# Altium PCB middlePCB_rev3.PcbDoc
Units mm, origin at the board's own origin, x right, y up, seen from the top; angles counter-clockwise.
Board outline 100.07 x 100 mm, 2 copper layers (Top Layer, Bottom Layer); 63 components, 65 nets, 272 pads, 238 vias.
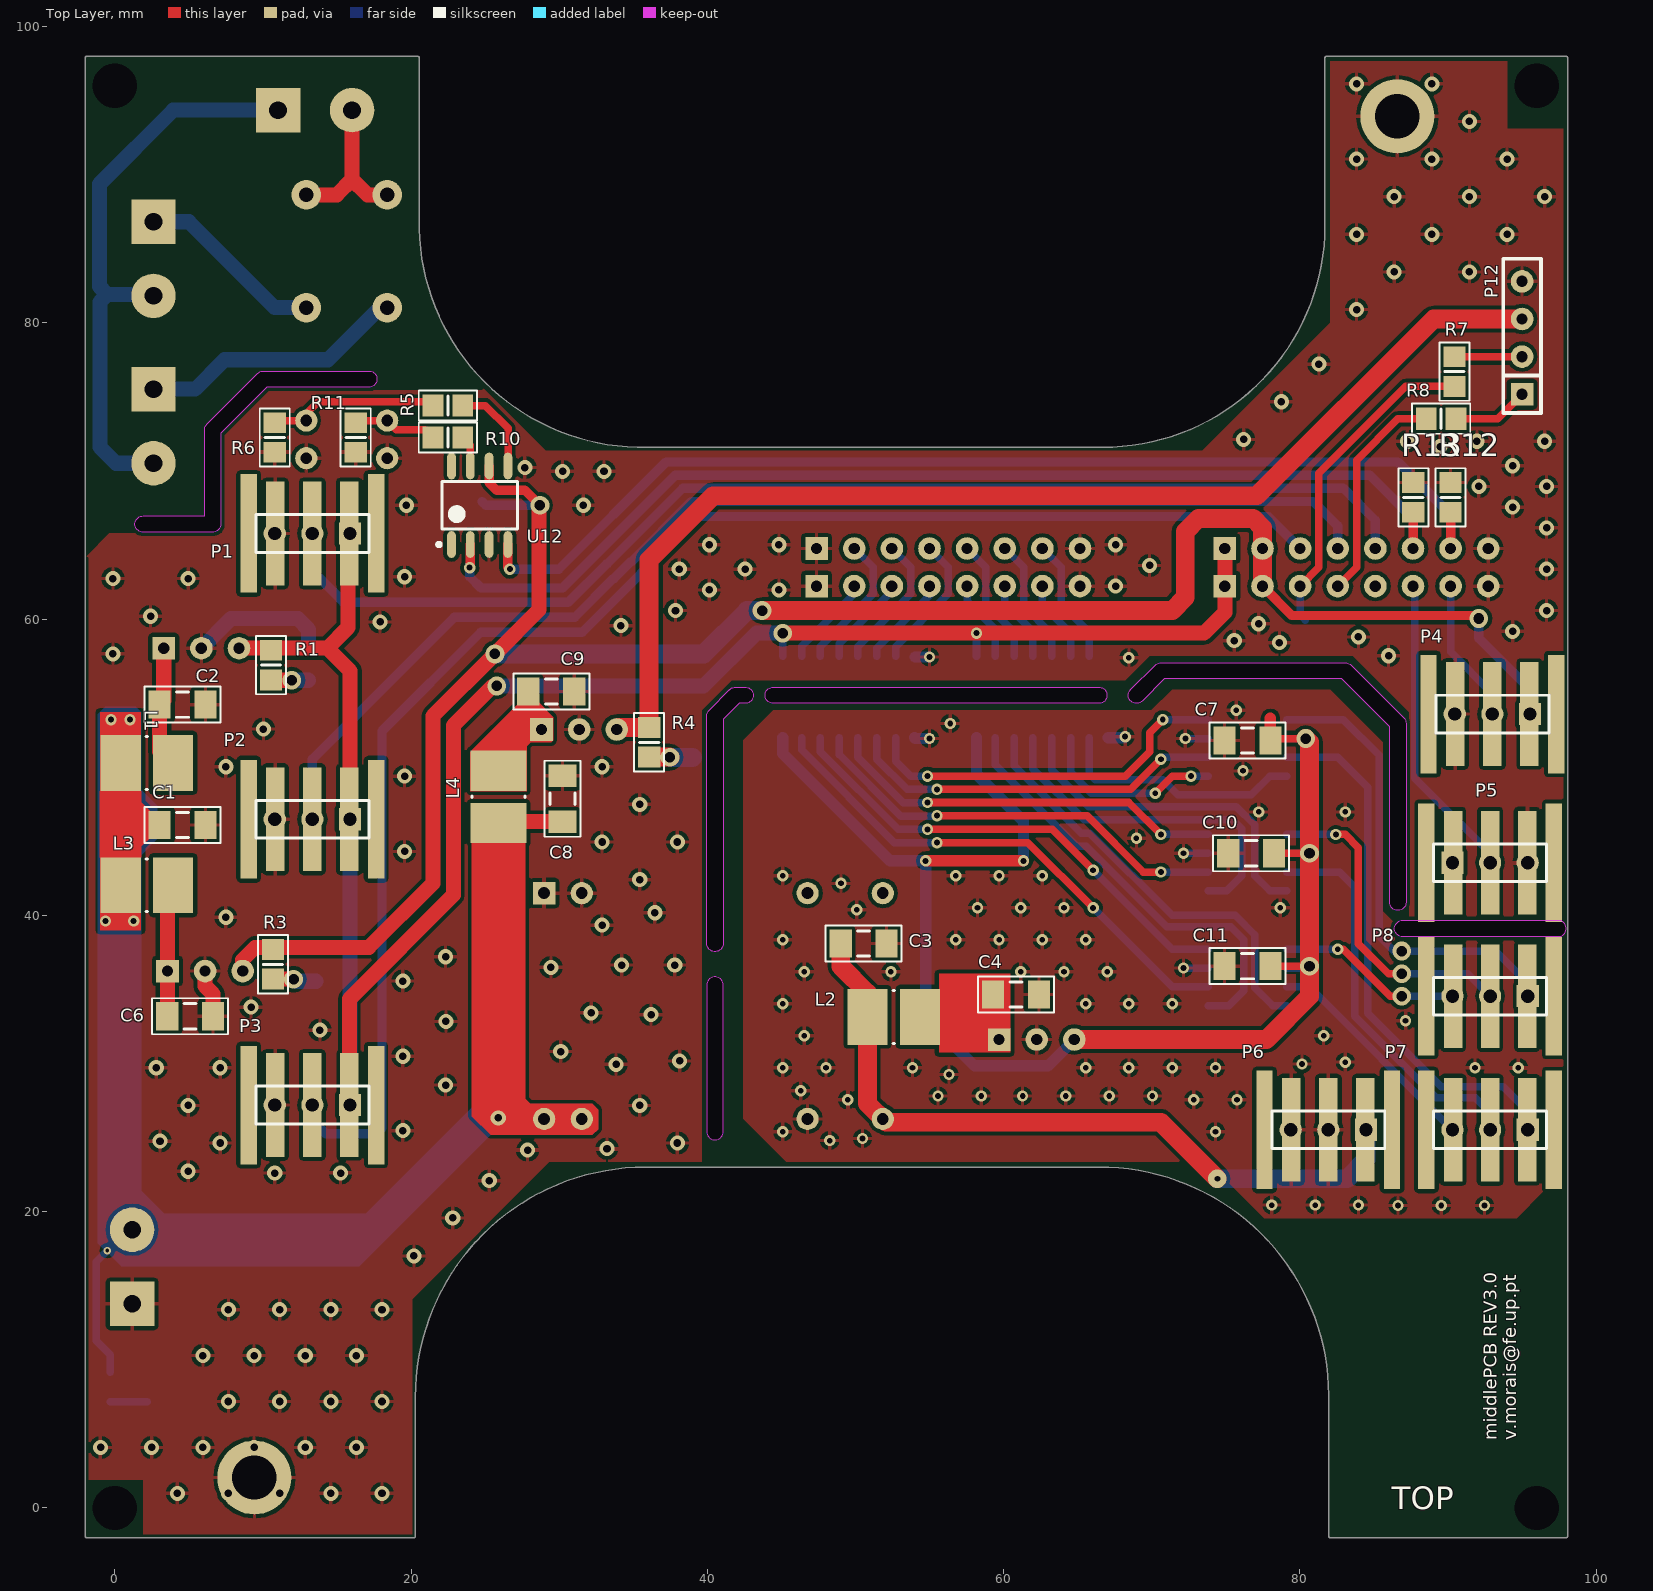
[diagram p0: Top Layer view]
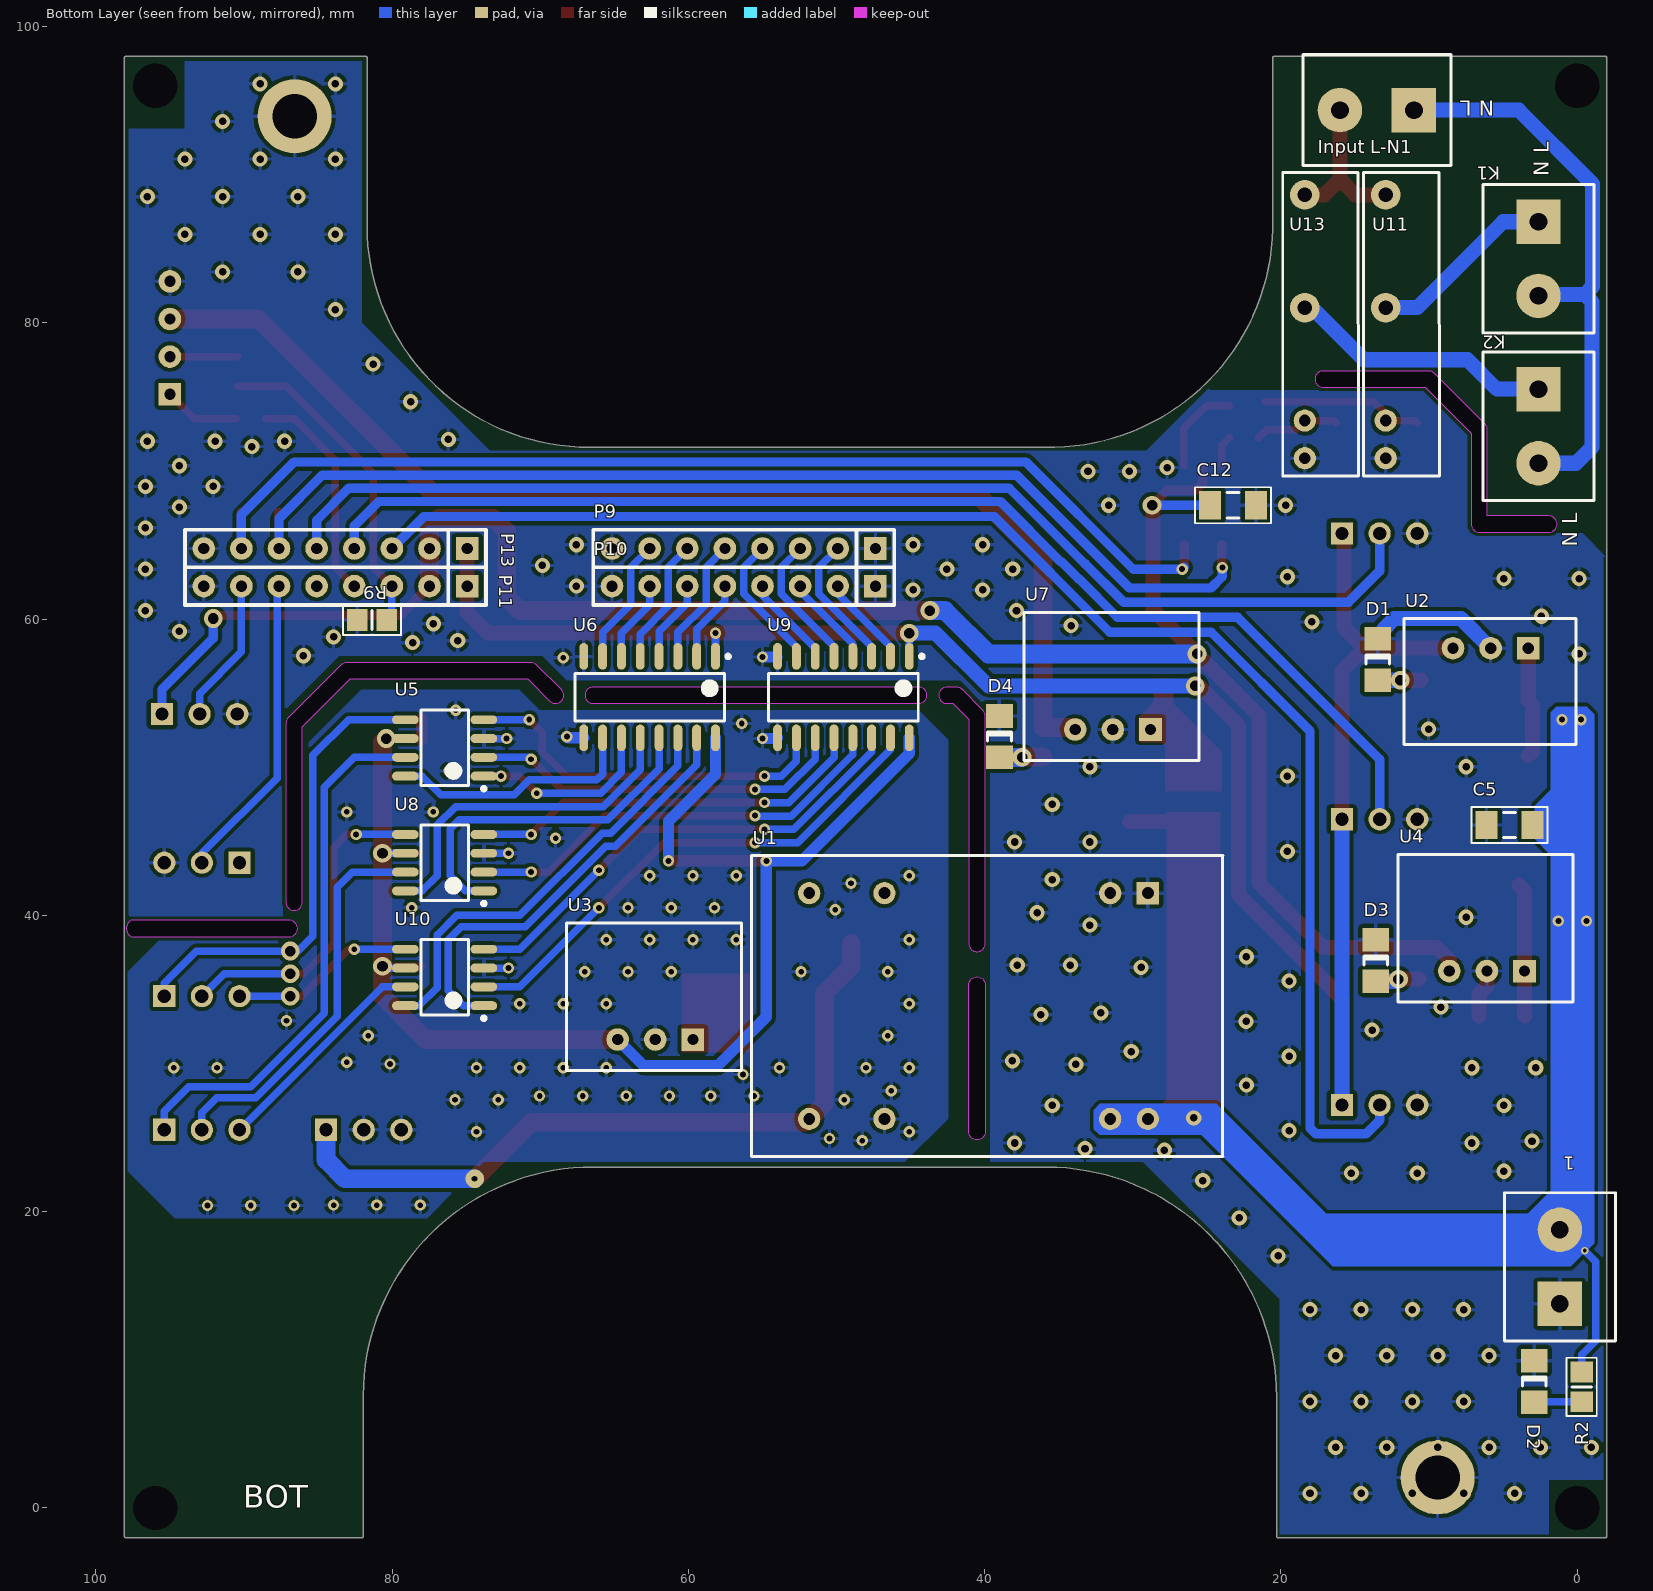
[diagram p1: Bottom Layer view, seen from below]

## Layer stack, top to bottom
Top Solder: solder mask 0.0102, Solder Resist, Dk 3.5
Top Layer: signal copper 0.0356
Dielectric 1: dielectric 0.32, FR-4, Dk 4.8
Bottom Layer: signal copper 0.0356
Bottom Solder: solder mask 0.0102, Solder Resist, Dk 3.5

## Board outline
-1.905,-2.005 20.193,-2.005 ccw(c20.193,-1.905) 20.293,-1.905 20.293,7.493 cw(c35.814,7.493) 35.814,23.014 66.421,23.014 ccw(c66.421,23.114) 66.421,23.014 cw(c66.484,7.557) 81.942,7.62 81.942,-1.905 ccw(c82.042,-1.905) 82.042,-2.005 97.968,-2.005 ccw(c97.968,-1.905) 98.068,-1.905 98.068,97.892 ccw(c97.968,97.892) 97.968,97.992 81.788,97.992 ccw(c81.788,97.892) 81.688,97.892 81.688,86.551 cw(c66.707,86.582) 66.675,71.601 ccw(c66.675,71.501) 66.675,71.601 35.941,71.601 ccw(c35.941,71.501) 35.939,71.601 cw(c35.623,86.678) 20.547,86.361 cw(c35.623,86.678) 20.547,86.362 20.547,86.36 20.547,97.892 ccw(c20.447,97.892) 20.447,97.992 -1.905,97.992 ccw(c-1.905,97.892) -2.005,97.879 ccw(c-1.905,97.866) -2.005,97.866 -2.005,-1.905 ccw(c-1.905,-1.905)
cut-out: 69.35,54.475 cw(c68.961,54.864) 68.572,55.253 70.223,56.904 cw(c70.611,56.517) 70.612,57.065 83.058,57.065 cw(c83.058,56.515) 83.448,56.903 87.003,53.348 cw(c86.616,52.96) 87.164,52.959 87.164,40.894 cw(c86.614,40.894) 86.064,40.894 86.064,52.731 82.83,55.965 70.84,55.965
cut-out: 44.45,54.314 cw(c44.45,54.864) 44.45,55.414 66.421,55.414 cw(c66.421,54.864) 66.971,54.864 cw(c66.421,54.864) 66.421,54.314
cut-out: 39.963,25.4 ccw(c40.513,25.4) 41.063,25.4 41.063,35.306 ccw(c40.513,35.306) 39.963,35.306
cut-out: 86.926,38.566 cw(c86.926,39.116) 86.926,39.666 97.612,39.666 cw(c97.318,39.116) 97.612,38.566
cut-out: 1.905,65.871 cw(c1.905,66.421) 1.905,66.971 6.054,66.971 6.054,72.771 cw(c6.604,72.771) 6.216,73.161 6.215,73.16 9.644,76.589 9.643,76.588 cw(c10.033,76.2) 10.033,76.75 17.145,76.75 cw(c17.145,76.2) 17.695,76.2 cw(c17.145,76.2) 17.145,75.65 10.261,75.65 7.154,72.543 7.154,66.421 cw(c6.604,66.421) 6.604,65.871
cut-out: 39.963,38.1 39.963,53.467 cw(c40.513,53.467) 40.125,53.857 40.124,53.856 41.521,55.253 41.52,55.252 cw(c41.91,54.864) 41.91,55.414 42.545,55.414 cw(c42.545,54.864) 43.095,54.864 cw(c42.545,54.864) 42.545,54.314 42.138,54.314 41.063,53.239 41.063,38.1 cw(c40.513,38.1)

## Design rules (kind name [scope] priority, off if disabled: settings)
Clearance [All] p1: gap=0.254 ignorepadtopadclearanceinfootprint=FALSE
Height [All] p1: minheight=0 maxheight=254 prefheight=12.7
HoleSize [All] p1: absolutevalues=TRUE maxlimit=25.4 minlimit=0.2 maxpercent=80.000 minpercent=20.000
PlaneClearance [All] p1: clearance=2.54
PolygonConnect [All] p1: connectstyle=Relief reliefconductorwidth=0.254 reliefentries=4 polygonreliefangle="90 Angle" airgapwidth=0.254
RoomDefinition middlePCB_rev3 [InComponentClass('middlePCB_rev3')] p1: confinementstyle=ConfineIn formatcopy=TRUE lockcomponents=FALSE outline -43.613,-86.525 7.187,-86.525 7.187,-61.125 -43.613,-61.125
RoutingVias [All] p1: holewidth=0.711 width=1.27 viastyle="Through Hole" minholewidth=0.711 minwidth=1.27 maxholewidth=0.711 maxwidth=1.27
SilkToSilkClearance [All] p1: silktosilkclearance=0.025
SilkToSolderMaskClearance [IsPad] p1: minsilkscreentomaskgap=0.025 clearancetoexposedcopper=TRUE
SolderMaskExpansion [All] p1: expansion=0.102
Width [All] p1: maxlimit=3.81 minlimit=0.127 preferedwidth=0.508
25 further rules are at their usual default settings.

## Components (designator, comment, footprint, x,y, rotation, side; value= is the part's Value field where it differs from the comment)
1 "P 2p 5mm" connector1x2_parafuso 1.168,16.281 r90 bottom
C1 "C 10uF 1206 MLCC 50V X5R" CAPC_1206 4.572,46.101 r180 top
C2 "C 10uF 1206 MLCC 50V X5R" CAPC_1206 4.572,54.229 r180 top
C3 "C 10uF 1206 MLCC 50V X5R" CAPC_1206 50.546,38.1 r180 top
C4 "C 10uF 1206 MLCC 50V X5R" CAPC_1206 60.833,34.671 r180 top
C5 "C 10uF 1206 MLCC 50V X5R" CAPC_1206 4.572,46.101 r180 bottom
C6 "C 10uF 1206 MLCC 50V X5R" CAPC_1206 5.08,33.198 r180 top
C7 "C 10uF 1206 MLCC 50V X5R" CAPC_1206 76.454,51.808 r0 top
C8 "C 10uF 1206 MLCC 50V X5R" CAPC_1206 30.226,47.879 r270 top
C9 "C 10uF 1206 MLCC 50V X5R" CAPC_1206 29.464,55.118 r180 top
C10 "C 10uF 1206 MLCC 50V X5R" CAPC_1206 76.708,44.196 r0 top
C11 "C 10uF 1206 MLCC 50V X5R" CAPC_1206 76.454,36.576 r0 top
C12 "C 10uF 1206 MLCC 50V X5R" CAPC_1206 23.233,67.691 r0 bottom
D1 "IC LED 1206" DIODE_1206 13.462,57.277 r90 bottom
D2 "IC LED 1206" DIODE_1206 2.896,8.534 r90 bottom
D3 "IC LED 1206" DIODE_1206 13.589,36.957 r90 bottom
D4 "IC LED 1206" DIODE_1206 38.989,52.07 r90 bottom
"Input L-N1" "P 2p 5mm" connector1x2_parafuso 13.516,94.361 r0 bottom
K1 "P 2p 5mm" connector1x2_parafuso 2.608,84.328 r270 bottom
K2 "P 2p 5mm" connector1x2_parafuso 2.608,73.025 r270 bottom
L1 "IND RLS-126" "Inductor - RLS-126" 2.159,50.292 r0 top
L2 "IND RLS-126" "Inductor - RLS-126" 52.578,33.147 r0 top
L3 "IND RLS-126" "Inductor - RLS-126" 2.159,42.037 r0 top
L4 "IND RLS-126" "Inductor - RLS-126" 25.908,48.006 r90 top
P1 "P 8p 2.54 SR DW 3P" MOLEX_3p_105431_1103 13.335,65.786 r180 top locked
P2 "P 8p 2.54 SR DW 3P" MOLEX_3p_105431_1103 13.335,46.495 r180 top locked
P3 "P 8p 2.54 SR DW 3P" MOLEX_3p_105431_1103 13.335,27.203 r180 top locked
P4 "P 8p 2.54 SR DW 3P" MOLEX_3p_105431_1103 92.989,53.594 r180 top locked
P5 "P 8p 2.54 SR DW 3P" MOLEX_3p_105431_1103 92.837,43.561 r0 top locked
P6 "P 8p 2.54 SR DW 3P" MOLEX_3p_105431_1103 81.915,25.527 r180 top locked
P7 "P 8p 2.54 SR DW 3P" MOLEX_3p_105431_1103 92.837,25.527 r180 top locked
P8 "P 8p 2.54 SR DW 3P" MOLEX_3p_105431_1103 92.837,34.554 r180 top locked
P9 "P 8p 2.54 SR DW 8P" "Header 8x1 8.5mm" 47.371,64.77 r0 bottom
P10 "P 8p 2.54 SR DW 8P" "Header 8x1 8.5mm" 47.371,62.23 r0 bottom
P11 "P 8p 2.54 SR DW 8P" "Header 8x1 8.5mm" 74.93,62.23 r0 bottom
P12 "P 4p 2.54 MOL FAN" "HEADER 4p molex" 94.996,75.184 r90 top
P13 "P 8p 2.54 SR DW 8P" "Header 8x1 8.5mm" 74.93,64.77 r0 bottom
R1 "R 150 1/8W 0805 1%" RESC_0805 10.541,56.896 r90 top
R2 "R 2k7 1/8 0805 1%" RESC_0805 -0.305,8.179 r90 bottom
R3 "R 330 1/8 0805 1%" RESC_0805 10.668,36.703 r90 top
R4 "R 1k2 1/8 0805 1%" RESC_0805 36.068,51.689 r90 top
R5 "R 10 1/8W 0805 1%" RESC_0805 22.479,74.422 r180 top
R6 "R 0 1/8W 0805" RESC_0805 10.795,72.263 r270 top
R7 "R 0 1/8W 0805" RESC_0805 90.424,76.708 r270 top
R8 "R 0 1/8W 0805" RESC_0805 89.535,73.533 r180 top
R9 "R 0 1/8W 0805" RESC_0805 81.356,59.944 r180 bottom
R10 "R 10 1/8W 0805 1%" RESC_0805 22.479,72.263 r180 top
R11 "R 0 1/8W 0805" RESC_0805 16.256,72.263 r270 top
R12 "R 0 1/8W 0805" RESC_0805 90.17,68.224 r270 top
R13 "R 0 1/8W 0805" RESC_0805 87.655,68.224 r270 top
U1 "IC DC/DC 15V ISO" "MeanWell SCWNo6" 28.981,26.264 r270 bottom
U2 "IC DC/DC 3V3" "DC/DC - R-78E3.3" 0.092,60.039 r0 bottom
U3 "IC DC/DC 5V" "DC/DC - OKI-78SR-E" 68.23,29.523 r180 bottom
U4 "IC DC/DC 5V" "DC/DC - OKI-78SR-E" 12.092,34.146 r180 bottom
U5 "IC Driver 5A Dual ENA IX4340" SOIC-MIC4126 76.454,51.308 r0 bottom
U6 "IC ISO SI8660" SOIC127P610X155-16N 62.611,54.737 r270 bottom
U7 "IC DC/DC 12V" "DC/DC - OKI-78SR-E" 37.344,50.453 r180 bottom
U8 "IC Driver 5A Dual ENA IX4340" SOIC-MIC4126 76.454,43.561 r0 bottom
U9 "IC ISO SI8660" SOIC127P610X155-16N 49.53,54.737 r270 bottom
U10 "IC Driver 5A Dual ENA IX4340" SOIC-MIC4126 76.454,35.814 r0 bottom
U11 "IC Relay 5A 5V 5x20mm" "Relay - G6DN" 12.923,73.406 r90 bottom
U12 "IC DUAL MOS DRIVER MIC4126" SOIC-MIC4126 24.63,67.691 r90 top
U13 "IC Relay 5A 5V 5x20mm" "Relay - G6DN" 18.384,73.406 r90 bottom

## Footprints (in the part's own frame and the unit in brackets; to place one, negate y for a bottom-side part, rotate by r counter-clockwise, add the part's x,y. Pads: shape width x height; smd on the part's side, far side on the other; paste and mask are expansions set on the pad)
CAPC_1206 [mm] "Chip Capacitor, Body 3.2x1.6mm, IPC Low Density"
  rect 1.5x1.9 smd: 1(-1.55,0) 2(1.55,0)
  silkscreen extent -2.57,-1.21 2.57,1.21, body extent -1.7,-0.9 1.7,0.9, height 1.35
connector1x2_parafuso [mm] "Connector; Header; 2 Position"
  rect 3x3 hole 1.2: 1(-2.5,0)
  round 3 hole 1.2: 2(2.5,0)
  silkscreen extent -5,-3.75 5,3.75, body extent -4.92,-4.53 5.68,4.47, height 14.6
"DC/DC - OKI-78SR-E" [mil]
  rect 60x60 hole 30: 1(336.22,82.68)
  round 60 hole 30: 2(236.22,82.68) 3(136.22,82.68)
  silkscreen extent 0,0 465,393, body extent 8,8 456,385, height 693
"DC/DC - R-78E3.3" [mil]
  rect 60x60 hole 30: 1(126.38,78.74)
  round 60 hole 30: 2(226.38,78.74) 3(326.38,78.74)
  silkscreen extent 0,0 457,335, body extent 8,8 447,325, height 402
DIODE_1206 [mm] "Chip Diode; Body 3.2 x 1.6 mm (LxW typ)"
  rect 1.6x1.8 smd: 1(-1.4,0) 2(1.4,0)
  silkscreen extent -0.3,-0.8 0.3,0.8
"HEADER 4p molex" [mil] "header 4p"
  rect 60x60 hole 30: 1(0,0)
  round 60 hole 30: 2(100,0) 3(200,0) 4(300,0)
  silkscreen extent -50,-50 360,50, body extent -50,-102 352,128, height 407
"Header 8x1 8.5mm" [mil] "Stackable 8 pin header"
  rect 60x60 hole 30: 1(0,0)
  round 60 hole 30: 2(100,0) 3(200,0) 4(300,0) 5(400,0) 6(500,0) 7(600,0) 8(700,0)
  silkscreen extent -50,-50 750,50, body extent -50,-50 750,50, height 335
"Inductor - RLS-126" [mm]
  rect 2.72x3.77 smd: 1(-1.77,0) 2(1.77,0)
  silkscreen extent -0.05,-1.79 0.05,1.79, body extent -2.55,-1.8 2.55,1.8, height 2.6
"MeanWell SCWNo6" [mm]
  rect 1.5x1.5 hole 0.8: 2(-15.24,0)
  round 1.5 hole 0.8: 3(-15.24,-2.54) 9(-15.24,-17.78) 11(-15.24,-22.86) 14(0,-22.86) 16(0,-17.78) 22(0,-2.54) 23(0,0)
  silkscreen extent -17.78,-26.75 2.54,5.08, body extent -17.65,-26.64 2.44,4.95, height 10.2
MOLEX_3p_105431_1103 [mm] "conector 3p 2.5mm"
  rect 1.1x8 smd: 0(-4.305,0) 0(4.305,0)
  rect 1.5x1.5 hole 0.9: 1(-2.54,0)
  rect 1.24x7 smd: 1(-2.5,0) 2(0,0) 3(2.5,0)
  round 1.5 hole 0.9: 2(0,0) 3(2.54,0)
  silkscreen extent -3.81,-1.27 3.81,1.27, body extent -5.36,-4.14 5.36,4.11, height 11.3
"Relay - G6DN" [mm]
  round 1.5 hole 0.8: 1(-2.54,0)
  round 1.5 hole 0.8 paste+0: 2(0,0)
  round 2 hole 1: 3(7.62,0) 4(15.24,0)
  silkscreen extent -3.73,-3.62 16.74,1.49, body extent -3.33,-3.53 16.51,1.42, height 13
RESC_0805 [mm] "Chip Resistor, Body 2.0x1.3mm, IPC Low Density"
  rect 1.4x1.5 smd: 1(-1,0) 2(1,0)
  silkscreen extent -1.96,-1.01 1.96,1.01, body extent -1.07,-0.7 1.08,0.7, height 0.65
SOIC127P610X155-16N [mm] "SOIC, 16-Leads, Body 10,05x3,95mm, Pitch 1,27mm, IPC Medium Density"
  oval 1.8x0.6 smd: 1(-2.75,4.445) 2(-2.75,3.175) 3(-2.75,1.905) 4(-2.75,0.635) 5(-2.75,-0.635) 6(-2.75,-1.905) 7(-2.75,-3.175) 8(-2.75,-4.445) 9(2.75,-4.445) 10(2.75,-3.175) 11(2.75,-1.905) 12(2.75,-0.635) 13(2.75,0.635) 14(2.75,1.905) 15(2.75,3.175) 16(2.75,4.445)
  silkscreen extent -2.87,-5.05 1.6,5.42, body extent -3.08,-5.05 3.08,5.05, height 1.55
SOIC-MIC4126 [mm] "SOIC, 8-Leads, Body 5,08x3,95mm, Pitch 1,27mm, IPC Medium Density"
  oval 1.8x0.6 smd: 1(-2.65,1.905) 2(-2.65,0.635) 3(-2.65,-0.635) 4(-2.65,-1.905) 5(2.65,-1.905) 6(2.65,-0.635) 7(2.65,0.635) 8(2.65,1.905)
  silkscreen extent -2.77,-2.55 1.6,2.88, body extent -2.83,-2.55 2.83,2.55, height 1.55

## Part data
1 "Input L-N1" K1 K2: library part gen_purpose_conn_1x2, "Bloques de terminales de PCB de perfil estándar RS de 5,0 mm", Price=0,24, RS VPN=896-6696
C1 C2 C3 C4 C5 C6 C7 C8 C9 C10 C11 C12: library part "Capacitor SMD", "Capacitores de cerâmica multicamada MLCC - SMD/SMT 1206 50V 10uF 20% X5R", Mouser VPN=963-UMK316BBJ106ML-T, Price=0,31
D1 D2 D3 D4: library part LED, "LEDs padrão - SMD GREEN WATER CLEAR", Mouser VPN=604-APT3216SGC, Price=0,387
L1 L2 L3 L4: library part Inductor, "Indutores fixos Line Inductors for RECOM Power Supply", Mouser VPN=919-RLS-126, Price=0,549
P1 P2 P3 P4 P5 P6 P7 P8: library part "Header 3", "Distribuidores e Alojamento de Fios CGrid Hrd SRDW THo le 8ckt", Mouser VPN=538-87937-0800, Price=0,621
P9 P10 P11 P13: library part jumper_8p, "Distribuidores e Alojamento de Fios CGrid Hrd SRDW THo le 8ckt", Mouser VPN=538-87937-0800, Price=0,621
P12: library part "Header 4p molex", "Distribuidores e Alojamento de Fios 4 PIN HEADER WITH FR R WITH FRICTION LOCK", Mouser VPN=538-47053-3000, Price=0,405
R1: library part Resistor, "Resistores de Filme Espesso - SMD 1/8watt 150ohms 1% 100ppm", Mouser VPN=71-CRCW0805-150-E3, Price=0,09
R2: library part Resistor, "Resistores de Filme Espesso - SMD 1/8watt 2.7Kohms 1% 100ppm", Mouser VPN=71-CRCW0805-2.7K-E3, Price=0,09
R3: library part Resistor, "Resistores de Filme Espesso - SMD 1/8Watt 330ohms 1% Commercial Use", Mouser VPN=71-CRCW0805330RFKEAC, Price=0,09
R4: library part Resistor, "Resistores de Filme Espesso - SMD 1/8watt 1.2Kohms 1%", Mouser VPN=71-CRCW08051K20FKEA, Price=0,09
R5 R10: library part Resistor, "Resistores de Filme Espesso - SMD 1/8Watt 10ohms 1% Commercial Use", Mouser VPN=71-CRCW080510R0FKEAC, Price=0,09
R6 R7 R8 R9 R11 R12 R13: library part Resistor, "Resistores de Filme Espesso - SMD 1/8Watt 0ohms Commercial Use", Mouser VPN=71-CRCW08050000Z0EAC, Price=0,09
U1: library part "MEANWELL - SCWN06", "Conversores CC/CC com isolação 6W 18-36Vin 15Vout 400mA DIP24 Iso", Mouser VPN=709-SCWN06B-15, Price=8,26
U2: library part "DC/DC - R-78E3.3", "Conversores CC/CC sem isolação 3.3V 500MA OUT THRU", Mouser VPN=919-R-78E3.3-0.5, Price=2,43
U3 U4: library part "DC/DC - R-78E3.3", "Conversores CC/CC sem isolação 7-36Vin 5Vout 1.5A VSIP Encapsulated", Mouser VPN=580-OK78SR5/1.5W36EC, Price=5,31
U5 U8 U10: library part "Driver - IX4340", "Drivers de portas Dual 5A Gate Driver IC", Mouser VPN=747-IX4340NETR, Price=0,891
U6 U9: library part "ISO SI8660", "Isoladores digitais 1 kV 6-channel digital isolator", Mouser VPN=634-SI8660BA-B-IS1, Price=1,82
U7: library part "DC/DC - R-78E3.3", "Conversores CC/CC sem isolação 15-36Vin 12Vout 1.0A VSIP Encapsulated", Mouser VPN=580-OKI78SR12/1W36EC, Price=5,31
U11 U13: library part "Relay - G6DN", "Relés para uso geral 1 form A w/ 5VDC Coil-standard type", Mouser VPN=653-G6DN-1A-LDC5, Price=1,59
U12: library part MOS_DRIVER-MIC4126, "Drivers de portas 1.5A Dual High Speed MOSFET Driver with Low Thermal Impedance", Mouser VPN=998-MIC4126YME, Price=0,756

## Free pads (board coordinates)
  round 1.524 hole 3 unplated: 4(0,0) 4(0,96) 4(96,0) 4(96,96)
  round 5 hole 3: 5(9.423,2.057) 5(86.577,93.943)

## Via types
v1: diameter 1.016, hole 0.508, Top Layer to Bottom Layer, 124 vias
v2: diameter 0.762, hole 0.381, Top Layer to Bottom Layer, 66 vias
v3: diameter 0.762, hole 0.4, Top Layer to Bottom Layer, 31 vias
v4: diameter 1.27, hole 0.711, Top Layer to Bottom Layer, 15 vias
v5: diameter 1.27, hole 0.4, Top Layer to Bottom Layer, 1 vias
v6: diameter 0.508, hole 0.254, Top Layer to Bottom Layer, 1 vias

## Nets (pads, with @x,y where several pads share a name; then routed paths per layer and width w, separated by ;. In a path a pad name is that pad's centre, name@x,y a point inside that pad or via, vN(x,y) a via of type N, cw(c..) or ccw(c..) an arc to the next point about the centre after c; other vN are vias at no path point)
3V3: P1.1 P2.1 P3.1 P11.1 P13.1 R1.2 U2.3 U6.1 U9.1 | length 137.3
  Top Layer w1.016: U2.3 14.351,58.039 ; P3.1@15.835,27.203 15.835,34.367 22.86,41.392 22.86,52.832 25.527,55.499 v4(25.781,55.499) ; P2.1@15.875,46.495 15.875,56.515 14.351,58.039 ; P1.1@15.875,65.786 15.748,65.659 15.748,59.436 14.351,58.039 ; v4(45.085,59.055) v3(58.166,59.055) 73.533,59.055 74.93,60.452 P11.1 P13.1
  Bottom Layer w0.508: U9.1 v4(45.085,59.055) v4@45.085,59.182 ; U6.1 v3(58.166,59.055) v3@58.166,59.182
  Bottom Layer w1.016: P3.1@15.875,27.203 P2.1@15.875,46.495 ; v4(25.781,55.499) 39.751,55.499 43.307,59.055 v4(45.085,59.055)
3V3GND: 1.1 C1.1 C2.1 C5.1 C6.1 C8.1 C9.1 C12.1 D1.2 D2.2 D3.2 D4.2 P1.3 P2.3 P3.3 P4.3 P5.3 P9.1 P9.8 P10.1 P10.8 P11.8 P12.4 P13.8 pad.5 R6.2 R9.1 R11.2 R12.1 R13.1 U1.2 U1.3 U2.2 U4.2 U6.8 U7.2 U9.8 U11.1 U12.3 U13.1 | length 13.2
  Top Layer w1.016: U4.2 6.092,35.234 6.63,34.696 C6.1
  Bottom Layer w0.762: U9.8@54.019,57.443 v3(54.991,57.443)
  Bottom Layer w1.016: U2.2 7.842,60.039 12.351,60.039 13.081,59.309 D1.2@13.081,58.677
  other v1: 4.216,0.991 7.671,0.991 11.125,0.991 14.58,0.991 18.034,0.991 -0.965,4.089 2.489,4.089 5.944,4.089 9.398,4.089 12.852,4.089 16.307,4.089 7.671,7.188 11.125,7.188 14.58,7.188 18.034,7.188 5.944,10.287 9.398,10.287 12.852,10.287 16.307,10.287 7.671,13.386 11.125,13.386 14.58,13.386 18.034,13.386 20.193,17.018 22.809,19.583 25.273,22.098 10.795,22.606 15.24,22.606 4.953,22.733 27.864,24.155 33.223,24.257 7.112,24.638 37.973,24.638 3.048,24.765 19.44,25.468 4.953,27.178 35.433,27.178 22.327,28.55 2.794,29.718 7.112,29.718 33.833,29.947 38.125,30.175 19.44,30.493 30.099,30.81 13.843,32.258 22.352,32.842 36.195,33.299 32.156,33.426 9.195,33.807 19.44,35.573 29.439,36.5 34.214,36.652 37.795,36.652 22.327,37.211 32.893,39.345 7.493,39.878 36.449,40.183 35.433,42.418 19.558,44.323 32.893,44.958 37.973,44.958 35.433,47.498 19.558,49.403 7.493,50.038 32.893,50.038 10.033,52.578 85.979,57.531 -0.127,57.658 78.613,58.42 75.565,58.547 83.947,58.801 94.361,59.182 34.163,59.563 77.216,59.69 17.907,59.817 2.413,60.198 37.846,60.579 96.647,60.579 40.132,61.976 44.831,61.976 67.564,62.23 -0.127,62.738 4.953,62.738 19.558,62.865 38.1,63.373 42.545,63.373 96.647,63.373 69.85,63.627 40.132,65.024 44.831,65.024 67.564,65.024 96.647,66.167 94.361,67.564 19.685,67.691 31.623,67.691 92.075,68.961 96.647,68.961 30.226,69.977 33.02,69.977 27.686,70.231 94.361,70.358 89.459,71.653 87.249,72.009 91.948,72.009 96.52,72.009 76.2,72.136 78.74,74.676 81.28,77.216 83.82,80.899 86.36,83.439 91.44,83.439 83.82,85.979 88.9,85.979 93.98,85.979 86.36,88.519 91.44,88.519 96.52,88.519 83.82,91.059 88.9,91.059 93.98,91.059 91.44,93.599 83.82,96.139 88.9,96.139
  other v2: 68.453,57.404
5V: C12.2 P4.1 P11.2 P13.2 R3.2 U4.3 U12.6 | length 139.3
  Top Layer w0.635: U12.6 25.265,69.215 25.773,68.707 27.678,68.707 v4(28.694,67.691) v4@28.63,67.627 ; P11.2 79.451,60.249 91.872,60.249 v4(92.075,60.046)
  Top Layer w1.016: U4.3 8.632,37.004 9.474,37.846 17.145,37.846 21.463,42.164 21.463,53.467 v4(25.654,57.658) 28.63,60.634 v4@28.63,67.627
  Top Layer w1.27: v4(43.688,60.579) 71.374,60.579 72.263,61.468 72.263,65.913 73.152,66.802 76.835,66.802 77.47,66.167 P13.2 P11.2
  Bottom Layer w0.635: C12.2@24.783,67.945 25.037,67.691 v4(28.694,67.691) ; v4(92.075,60.046) 92.075,58.725 95.529,55.27 P4.1@95.529,53.594
  Bottom Layer w1.27: v4(25.654,57.658) 39.751,57.658 42.672,60.579 v4(43.688,60.579)
12V: P12.3 R4.2 U7.3 | length 79.2
  Top Layer w1.27: U7.3@33.909,52.578 34.02,52.689 R4.2 36.068,64.008 40.386,68.326 77.089,68.326 89.027,80.264 P12.3
24VDC: 1.2 C1.2 C5.2 C8.2 L1.1 L3.1 L4.1 R2.2 U1.22 U1.23 | length 13.2
  Top Layer w1.016: L4.1 26.001,46.329 C8.2
  Bottom Layer w0.508: v6(-0.508,17.374) -1.245,16.637 -1.245,11.278 -0.305,10.338 R2.2
  other v1: 25.883,26.34
  other v3: -0.635,39.624 1.27,39.624 -0.254,53.213 1.016,53.213
ena_uh: U5.8 U6.10 | length 16.9
  Bottom Layer w0.508: U6.10 65.786,49.53 66.167,49.149 70.739,49.149 71.755,48.133 76.708,48.133 77.978,49.403 U5.8
ena_ul: U5.1 U6.11 | length 12.8
  Top Layer w0.508: v3(70.231,48.251) 71.383,49.403 v3(72.644,49.403)
  Bottom Layer w0.508: U6.11 64.516,49.657 65.922,48.251 v3(70.231,48.251) ; v3@72.517,49.403 v3(72.644,49.403) U5.1
ena_vh: U6.12 U8.8 | length 23.4
  Bottom Layer w0.508: U6.12 63.246,49.849 65.742,47.353 75.716,47.353 76.962,46.107 76.962,42.672 77.978,41.656 U8.8
ena_vl: U6.13 U8.1 | length 23.7
  Bottom Layer w0.508: U6.13 61.976,49.911 65.432,46.455 75.465,46.455 76.073,45.847 76.073,42.672 75.057,41.656 U8.1
ena_wh: U6.14 U10.8 | length 29.1
  Bottom Layer w0.508: U6.14 60.706,50.103 65.252,45.557 65.822,45.557 71.374,40.005 75.637,40.005 76.962,38.68 76.962,35.128 78.181,33.909 U10.8
ena_wl: U6.15 U10.1 | length 29.7
  Bottom Layer w0.508: U6.15 59.436,50.165 64.942,44.659 65.577,44.659 70.993,39.243 75.321,39.243 76.2,38.364 76.2,34.925 75.184,33.909 U10.1
I_U: P1.2 P13.5 | length 81.1
  Bottom Layer w0.635: P1.2@13.335,65.786 13.335,63.246 15.43,61.151 30.621,61.151 33.213,63.743 33.245,63.743 38.336,68.834 82.931,68.834 85.09,66.675 P13.5
I_V: P2.2 P13.4 | length 82.7
  Bottom Layer w0.635: P2.2@13.335,46.495 13.335,50.546 22.923,60.134 31.041,60.134 33.634,62.727 33.666,62.727 34.819,63.88 34.87,63.88 38.935,67.945 80.899,67.945 82.55,66.294 P13.4
I_W: P3.2 P13.3 | length 101.9
  Bottom Layer w0.635: P3.2@13.335,27.203 13.335,26.162 14.224,25.273 17.653,25.273 18.034,25.654 18.034,52.451 24.701,59.118 31.545,59.118 39.356,66.929 77.851,66.929 P13.3
IN_UH: P8.1 U5.5 | length 31.7
  Bottom Layer w0.508: U5.5 82.931,53.213 85.344,50.8 85.344,38.608 86.36,37.592 v4(86.868,37.592) 93.218,37.592 95.377,35.433 P8.1@95.377,34.554
IN_UL: P7.1 U5.7 | length 36.4
  Bottom Layer w0.508: U5.7 82.55,50.673 84.582,48.641 84.582,33.397 89.531,28.448 93.726,28.448 95.377,26.797 P7.1@95.377,25.527
IN_VH: P8.2 U8.5 | length 22
  Top Layer w0.508: v3(82.423,45.466) 83.058,45.466 83.947,44.577 83.947,38.1 85.979,36.068 v4(86.868,36.068)
  Bottom Layer w0.508: U8.5 v3(82.423,45.466) ; v4(86.868,36.068) 91.323,36.068 P8.2@92.837,34.554
IN_VL: P7.2 U8.7 | length 26.7
  Bottom Layer w0.508: U8.7 82.677,42.926 83.693,41.91 83.693,33.209 89.216,27.686 91.821,27.686 92.837,26.67 P7.2@92.837,25.527
IN_WH: P8.3 U10.5 | length 12.7
  Top Layer w0.508: v3(82.55,37.719) 82.931,37.719 86.106,34.544 v4(86.868,34.544)
  Bottom Layer w0.508: U10.5 v3(82.55,37.719) ; v4(86.868,34.544) 86.762,34.544 86.751,34.554 P8.3@90.297,34.554
IN_WL: P7.3 U10.7 | length 15.2
  Bottom Layer w0.508: U10.7 80.645,35.179 P7.3@90.297,25.527
ISO_5gnd: C3.1 C4.1 C7.1 C10.1 C11.1 P6.2 P6.3 U1.16 U3.2 U5.3 U6.9 U8.3 U9.9 U10.3 | length 7.2
  Bottom Layer w0.508: v3@72.009,36.449 U10.3 ; v3(72.136,44.196) U8.3 ; v3(72.263,51.943) U5.3
  Bottom Layer w0.762: U9.9 54.019,51.943 v3(54.991,51.943) ; U6.9 68.116,51.987 v3(68.199,52.07)
  other v2: 78.105,20.447 81.026,20.447 83.947,20.447 86.62,20.423 89.541,20.423 92.462,20.423 48.254,24.802 50.469,24.942 45.085,25.4 74.295,25.4 49.466,27.559 72.834,27.559 75.755,27.559 55.562,27.813 58.483,27.813 61.277,27.813 64.198,27.813 67.12,27.813 70.04,27.813 46.298,28.157 56.311,29.26 45.085,29.718 48.006,29.718 53.848,29.718 65.532,29.718 68.453,29.718 71.374,29.718 74.295,29.718 91.821,29.718 94.742,29.718 80.137,29.972 83.058,30.099 46.545,31.877 81.597,31.877 87.122,32.893 45.085,34.036 65.532,34.036 68.453,34.036 71.374,34.036 46.545,36.195 52.387,36.195 61.151,36.195 64.072,36.195 66.992,36.195 45.085,38.354 56.769,38.354 59.69,38.354 62.611,38.354 65.532,38.354 50.089,40.386 58.229,40.513 61.151,40.513 64.072,40.513 78.676,40.513 49.022,42.164 45.085,42.672 56.769,42.672 59.69,42.672 62.611,42.672 68.961,45.212 77.216,46.99 83.058,46.99 76.154,49.758 56.388,52.959 75.692,53.858
  other v3: 72.136,36.449
ISO_5V: C7.2 C10.2 C11.2 U3.3 U5.6 U6.16 U8.6 U9.16 U10.6 | length 100.7
  Top Layer w0.508: C11.2 78.131,36.449 78.258,36.576 v4(80.645,36.576) ; C7.2 78.139,51.943 v4(80.391,51.943) ; C10.2 v4(80.645,44.196)
  Top Layer w0.762: v3(54.737,43.688) v3(61.341,43.688) ; C7.2 78.004,53.314
  Top Layer w1.27: U3.3 77.724,31.623 80.645,34.544 v4(80.645,36.576) v4(80.645,44.196) 80.645,51.689 v4(80.391,51.943)
  Bottom Layer w0.508: U10.6 80.518,36.449 v4(80.645,36.576) ; U8.6 v4(80.645,44.196) ; U5.6 v4(80.391,51.943)
  Bottom Layer w0.762: U9.16 45.085,50.927 52.324,43.688 v3(54.737,43.688) 54.737,33.147 58.039,29.845 62.992,29.845 U3.3 ; U6.16 58.166,49.53 61.341,46.355 v3(61.341,43.688)
ISO_15V: C3.2 L2.1 P6.1 U1.14 | length 49.9
  Top Layer w1.27: C3.2 48.996,36.577 50.808,34.765 L2.1 50.808,27.297 52.07,26.035 70.612,26.035 v5(74.422,22.225)
  Bottom Layer w1.27: v5(74.422,22.225) 83.185,22.225 84.455,23.495 P6.1@84.455,25.527
iso_ENA_UH: P9.7 U6.7 | length 8.6
  Bottom Layer w0.508: P9.7 63.881,63.5 63.881,61.022 65.786,59.117 U6.7
iso_ENA_UL: P10.7 U6.6 | length 5.5
  Bottom Layer w0.508: P10.7 62.611,60.96 64.516,59.055 U6.6
iso_ENA_VH: P9.6 U6.5 | length 8.5
  Bottom Layer w0.508: P9.6 61.341,63.5 61.341,61.022 ; 61.341,60.891 63.246,58.986 U6.5
iso_ENA_VL: P10.6 U6.4 | length 5.5
  Bottom Layer w0.508: P10.6 60.071,61.083 61.976,59.178 U6.4
iso_ENA_WH: P9.5 U6.3 | length 8.6
  Bottom Layer w0.508: P9.5 58.801,63.5 58.801,61.022 60.706,59.117 U6.3
iso_ENA_WL: P10.5 U6.2 | length 5.5
  Bottom Layer w0.508: P10.5 57.531,61.214 59.436,59.309 U6.2
iso_PWM_UH: P9.4 U9.7 | length 9.3
  Bottom Layer w0.508: U9.7 52.705,58.148 56.261,61.704 56.261,63.5 P9.4
iso_PWM_UL: P10.4 U9.6 | length 6.2
  Bottom Layer w0.508: U9.6 51.435,58.039 54.991,61.595 P10.4
iso_PWM_VH: P9.3 U9.5 | length 9.3
  Bottom Layer w0.508: U9.5 50.165,58.148 53.721,61.704 53.721,63.5 P9.3
iso_PWM_VL: P10.3 U9.4 | length 6.2
  Bottom Layer w0.508: U9.4 48.895,58.34 52.451,61.896 P10.3
iso_PWM_WH: P9.2 U9.3 | length 9.3
  Bottom Layer w0.508: U9.3 47.625,58.148 51.181,61.704 51.181,63.5 P9.2
iso_PWM_WL: P10.2 U9.2 | length 6.2
  Bottom Layer w0.508: U9.2 46.355,58.166 49.911,61.722 P10.2
NetC2_2: C2.2 L1.2 U2.1 | length 7.5
  Top Layer w1.016: L1.2@3.302,50.792 3.022,51.072 C2.2 3.302,54.509 U2.1
NetC4_2: C4.2 L2.2 U3.1
NetC6_2: C6.2 L3.2 U4.1 | length 9
  Top Layer w1.016: C6.2 3.552,33.22 U4.1 3.552,41.66 L3.2
NetC9_2: C9.2 L4.2 U7.1
NetD1_1: D1.1 R1.1 | length 2.5
  Top Layer w1.016: R1.1 10.56,55.877 v4(11.938,55.877)
  Bottom Layer w1.016: v4(11.938,55.877) D1.1@13.081,55.877
NetD2_1: D2.1 R2.1 | length 2.5
  Bottom Layer w0.508: R2.1 2.178,7.179 D2.1@2.184,7.185
NetD3_1: D3.1 R3.1 | length 3
  Top Layer w1.016: R3.1 12.049,35.703 v4(12.065,35.687)
  Bottom Layer w1.016: v4(12.065,35.687) 12.195,35.557 D3.1
NetD4_1: D4.1 R4.1 | length 2.9
  Top Layer w1.27: R4.1 37.449,50.689 v4(37.465,50.673)
  Bottom Layer w1.27: v4(37.465,50.673) 37.468,50.67 D4.1
"NetInput L-N1_1": "Input L-N1.1" K1.2 K2.2 | length 39.7
  Bottom Layer w1.016: K1.2@2.58,81.915 K1.2@2.667,81.828 ; K2.2 0.087,70.525 -1.016,71.628 -1.016,81.407 -0.508,81.915 ; K1.2 2.521,81.915 -0.508,81.915 ; 11.016,94.361 3.937,94.361 -1.043,89.381 -1.043,82.45 -0.508,81.915
"NetInput L-N1_2": "Input L-N1.2" U11.4 U13.4 | length 11
  Top Layer w1.016: U11.4 14.986,88.646 16.016,89.676 ; 16.016,94.361 16.016,89.676 ; U13.4 17.046,88.646 16.016,89.676
NetK1_1: K1.1 U11.3 | length 12.7
  Bottom Layer w1.016: K1.1@2.667,86.828 4.993,86.828 10.795,81.026 U11.3
NetK2_1: K2.1 U13.3 | length 18
  Bottom Layer w1.016: K2.1@2.667,75.525 5.421,75.525 7.408,77.512 14.393,77.512 17.907,81.026 U13.3
NetP11_3: P11.3 R7.2 R9.2 | length 22.1
  Top Layer w0.508: P11.3 81.28,63.5 81.28,69.85 87.138,75.708 R7.2
  Bottom Layer w0.508: P11.3 80.01,60.29 R9.2
NetP11_4: P11.4 R8.2 | length 14.9
  Top Layer w0.508: P11.4 83.82,63.5 83.82,70.739 86.614,73.533 R8.2
NetR5_1: R5.1 U12.5 | length 6.3
  Top Layer w0.508: R5.1 25.019,74.422 26.543,72.898 26.543,70.349 U12.5
NetR5_2: R5.2 R6.1 U11.2 | length 11.1
  Top Layer w0.508: R6.1 10.938,73.406 U11.2 12.923,73.883 13.716,74.676 R5.2@21.054,74.676
NetR10_1: R10.1 U12.7 | length 2.1
  Top Layer w0.508: R10.1 23.995,71.747 U12.7 U12.7@24.003,70.349
NetR10_2: R10.2 R11.1 U13.2 | length 5.8
  Top Layer w0.508: R11.1 16.399,73.406 U13.2 18.989,72.801 20.941,72.801 R10.2
PWM_FAN: P12.1 R8.1 | length 5.1
  Top Layer w0.508: R8.1 93.345,73.533 P12.1
pwm_uh: U5.4 U9.10 | length 25.4
  Top Layer w0.508: v3(54.864,49.403) 68.199,49.403 69.85,51.054 69.85,52.324 v3(70.739,53.213)
  Bottom Layer w0.508: U9.10 52.705,50.419 53.721,49.403 v3(54.864,49.403) ; v3(70.739,53.213) U5.4
pwm_ul: U5.2 U9.11 | length 25.6
  Top Layer w0.508: v3(55.499,48.514) 68.58,48.514 v3(70.612,50.546)
  Bottom Layer w0.508: U9.11 51.435,50.546 53.476,48.505 54.487,48.505 54.496,48.514 55.232,48.514 55.241,48.505 v3@55.499,48.505 ; v3(70.612,50.546) 70.739,50.673 U5.2
pwm_vh: U8.4 U9.12 | length 27.1
  Top Layer w0.508: v3(54.864,47.625) 68.453,47.625 v3(70.612,45.466)
  Bottom Layer w0.508: U9.12 50.165,50.673 53.231,47.607 v3@54.864,47.607 ; v3(70.612,45.466) U8.4
pwm_vl: U8.2 U9.13 | length 29.3
  Top Layer w0.508: v3(55.499,46.736) 65.629,46.736 69.439,42.926 v3(70.612,42.926)
  Bottom Layer w0.508: U9.13 48.895,50.865 53.051,46.709 v3@55.499,46.709 ; v3(70.612,42.926) U8.2
pwm_wh: U9.14 U10.4 | length 32.6
  Top Layer w0.508: v3(54.864,45.811) 63.282,45.811 v3(66.04,43.053)
  Bottom Layer w0.508: U9.14 47.625,51.058 52.872,45.811 v3(54.864,45.811) ; v3(66.04,43.053) 71.374,37.719 U10.4
pwm_wl: U9.15 U10.2 | length 34.9
  Top Layer w0.508: v3(55.499,44.913) 61.64,44.913 v3(66.04,40.513)
  Bottom Layer w0.508: U9.15 46.355,51.181 52.623,44.913 v3(55.499,44.913) ; v3(66.04,40.513) 71.374,35.179 U10.2
Relay_1: P13.7 R12.2 U12.4 | length 74.4
  Top Layer w0.635: v3@26.535,63.5 U12.4 ; P13.7 R12.2
  Bottom Layer w0.635: v3@26.535,63.5 v3(26.662,63.373) 29.972,63.373 37.211,70.612 86.614,70.612 90.17,67.056 P13.7
Relay_2: P13.6 R13.2 U12.2 | length 75.1
  Top Layer w0.635: v3(23.952,63.475) 23.995,63.517 U12.2 ; P13.6 87.655,64.795 R13.2
  Bottom Layer w0.635: v3(23.952,63.475) 23.952,62.865 24.714,62.103 30.226,62.103 37.846,69.723 84.709,69.723 87.63,66.802 P13.6
TACH_FAN: P12.2 R7.1 | length 4.6
  Top Layer w0.508: R7.1 94.98,77.708 P12.2
temp: P5.2 P11.6 | length 20.9
  Bottom Layer w0.508: P11.6@87.249,62.103 87.757,61.595 87.757,49.276 92.837,44.196 P5.2@92.837,43.561
V_DC: P4.2 P11.7 | length 10
  Bottom Layer w0.508: P11.7@89.662,62.23 90.17,61.722 90.17,57.785 92.989,54.966 P4.2@92.989,53.594
pads on no net: P1.0 P2.0 P3.0 P4.0 P5.0 P5.1 P6.0 P7.0 P8.0 P11.5 U1.9 U1.11 U12.1 U12.8

## Polygon pours and split planes (outlines as drawn)
ISO_5gnd on Top Layer "Top Layer-No Net" (solid, remove dead copper, pour order 12): 82.042,55.245 71.374,55.245 69.977,53.848 44.45,53.848 42.418,51.816 42.418,26.289 45.339,23.368 73.787,23.368 77.597,19.558 94.623,19.558 97.79,22.725 97.79,36.195 95.419,38.566 87.321,38.566 85.598,40.289 85.598,51.689
3V3GND on Top Layer "Top Layer-No Net" (solid, remove dead copper, pour order 22): 87.376,39.624 97.79,39.624 97.79,93.091 93.98,93.091 93.98,97.663 82.042,97.663 82.042,80.01 73.406,71.374 29.083,71.374 24.892,75.565 24.765,75.438 10.049,75.438 7.154,72.543 7.239,72.458 7.239,65.786 -0.381,65.786 -1.905,64.262 -1.778,64.135 -1.778,1.905 1.905,1.905 1.905,-1.778 20.066,-1.778 20.066,14.097 29.337,23.368 39.624,23.368 39.624,53.848 41.656,55.88 68.199,55.88 69.85,57.531 83.566,57.531 87.376,53.721
ISO_5gnd on Bottom Layer "Top Layer-No Net" (solid, remove dead copper, pour order 20): 82.082,55.245 71.414,55.245 70.017,53.848 44.45,53.848 42.458,51.856 42.458,26.289 45.379,23.368 73.827,23.368 77.637,19.558 94.663,19.558 97.83,22.725 97.83,36.195 95.459,38.566 87.361,38.566 85.638,40.289 85.638,51.689
3V3GND on Bottom Layer "Top Layer-No Net" (solid, remove dead copper, pour order 14): 87.376,39.624 97.79,39.624 97.79,93.091 93.98,93.091 93.98,97.663 82.042,97.663 82.042,80.01 73.406,71.374 29.083,71.374 24.892,75.565 24.765,75.438 10.049,75.438 7.154,72.543 7.239,72.458 7.239,65.786 -0.381,65.786 -1.905,64.262 -1.778,64.135 -1.778,1.905 1.905,1.905 1.905,-1.778 20.066,-1.778 20.066,14.097 29.337,23.368 39.624,23.368 39.624,53.848 41.656,55.88 68.199,55.88 69.85,57.531 83.566,57.531 87.376,53.721

## Other copper
Top Layer:
  rectangle net NetC4_2: 55.626,30.734 60.452,36.068
  rectangle net 24VDC: -1.016,38.989 1.778,43.942
  rectangle net 24VDC: -1.016,48.387 1.778,53.721
  region net NetC9_2: 27.813,48.387 27.813,51.435 28.067,51.689 29.464,51.689 29.591,51.816 29.591,53.395 28.575,54.411 28.575,55.968 27.266,55.968 27.266,54.317 24.003,51.054 24.003,48.387
  region net 24VDC: -1.016,48.387 -1.016,43.942 1.778,43.942 1.778,44.657 2.413,45.292 2.413,46.99 1.778,47.625 1.778,48.387
  region net 24VDC: 24.105,44.806 24.105,26.446 25.363,25.187 32.233,25.187 32.624,25.578 32.624,26.889 32.233,27.28 28.043,27.28 27.711,27.611 27.711,46.965 24.105,46.965
Bottom Layer:
  region net 24VDC: 0.432,16.307 -1.143,17.882 -1.143,29.964 1.778,29.964 1.778,21.412 3.327,19.863 16.942,19.863 20.547,23.468 24.359,27.28 32.233,27.28 32.624,26.848 32.624,25.578 32.233,25.187 25.363,25.187 16.483,16.307
  region net 24VDC: -1.143,53.594 -1.143,40.005 -1.143,23.114 1.778,23.114 1.778,44.069 2.872,45.163 2.872,47.398 1.778,48.492 1.778,53.721 1.397,54.102 -0.635,54.102

## Silkscreen, mask and mechanical layers (free items; w line width, h text height)
Top Overlay:
  text "middlePCB REV3.0 / v.morais@fe.up.pt" at 94.615,4.572 h0.89 r90
  text "TOP" at 86.201,-0.095 h1.52
Bottom Overlay:
  text "N" at 5.588,94.996 h1.02 r180
  text "L" at 7.112,94.996 h1.02 r180
  text "L" at 1.905,91.44 h1.02 r270
  text "N" at 1.905,89.916 h1.02 r270
  text "L" at 0,66.421 h1.02 r270
  text "N" at 0,64.897 h1.02 r270
  text "BOT" at 90.043,0 h1.52